# Altium PCB EUS1_Outline_5_trial07.PcbDoc (part 3 of 3)
Units mm, origin at the board's own origin, x right, y up, seen from the top; angles counter-clockwise.
Board outline 95.45 x 90.3 mm, 6 copper layers (Top Layer, Routing 1, GND, EPS_VCC, Routing 2, Bottom Layer), stack 2.257 mm thick; 247 components, 187 nets, 935 pads, 315 vias.
Unrouted connection lines stored in the file: 34.
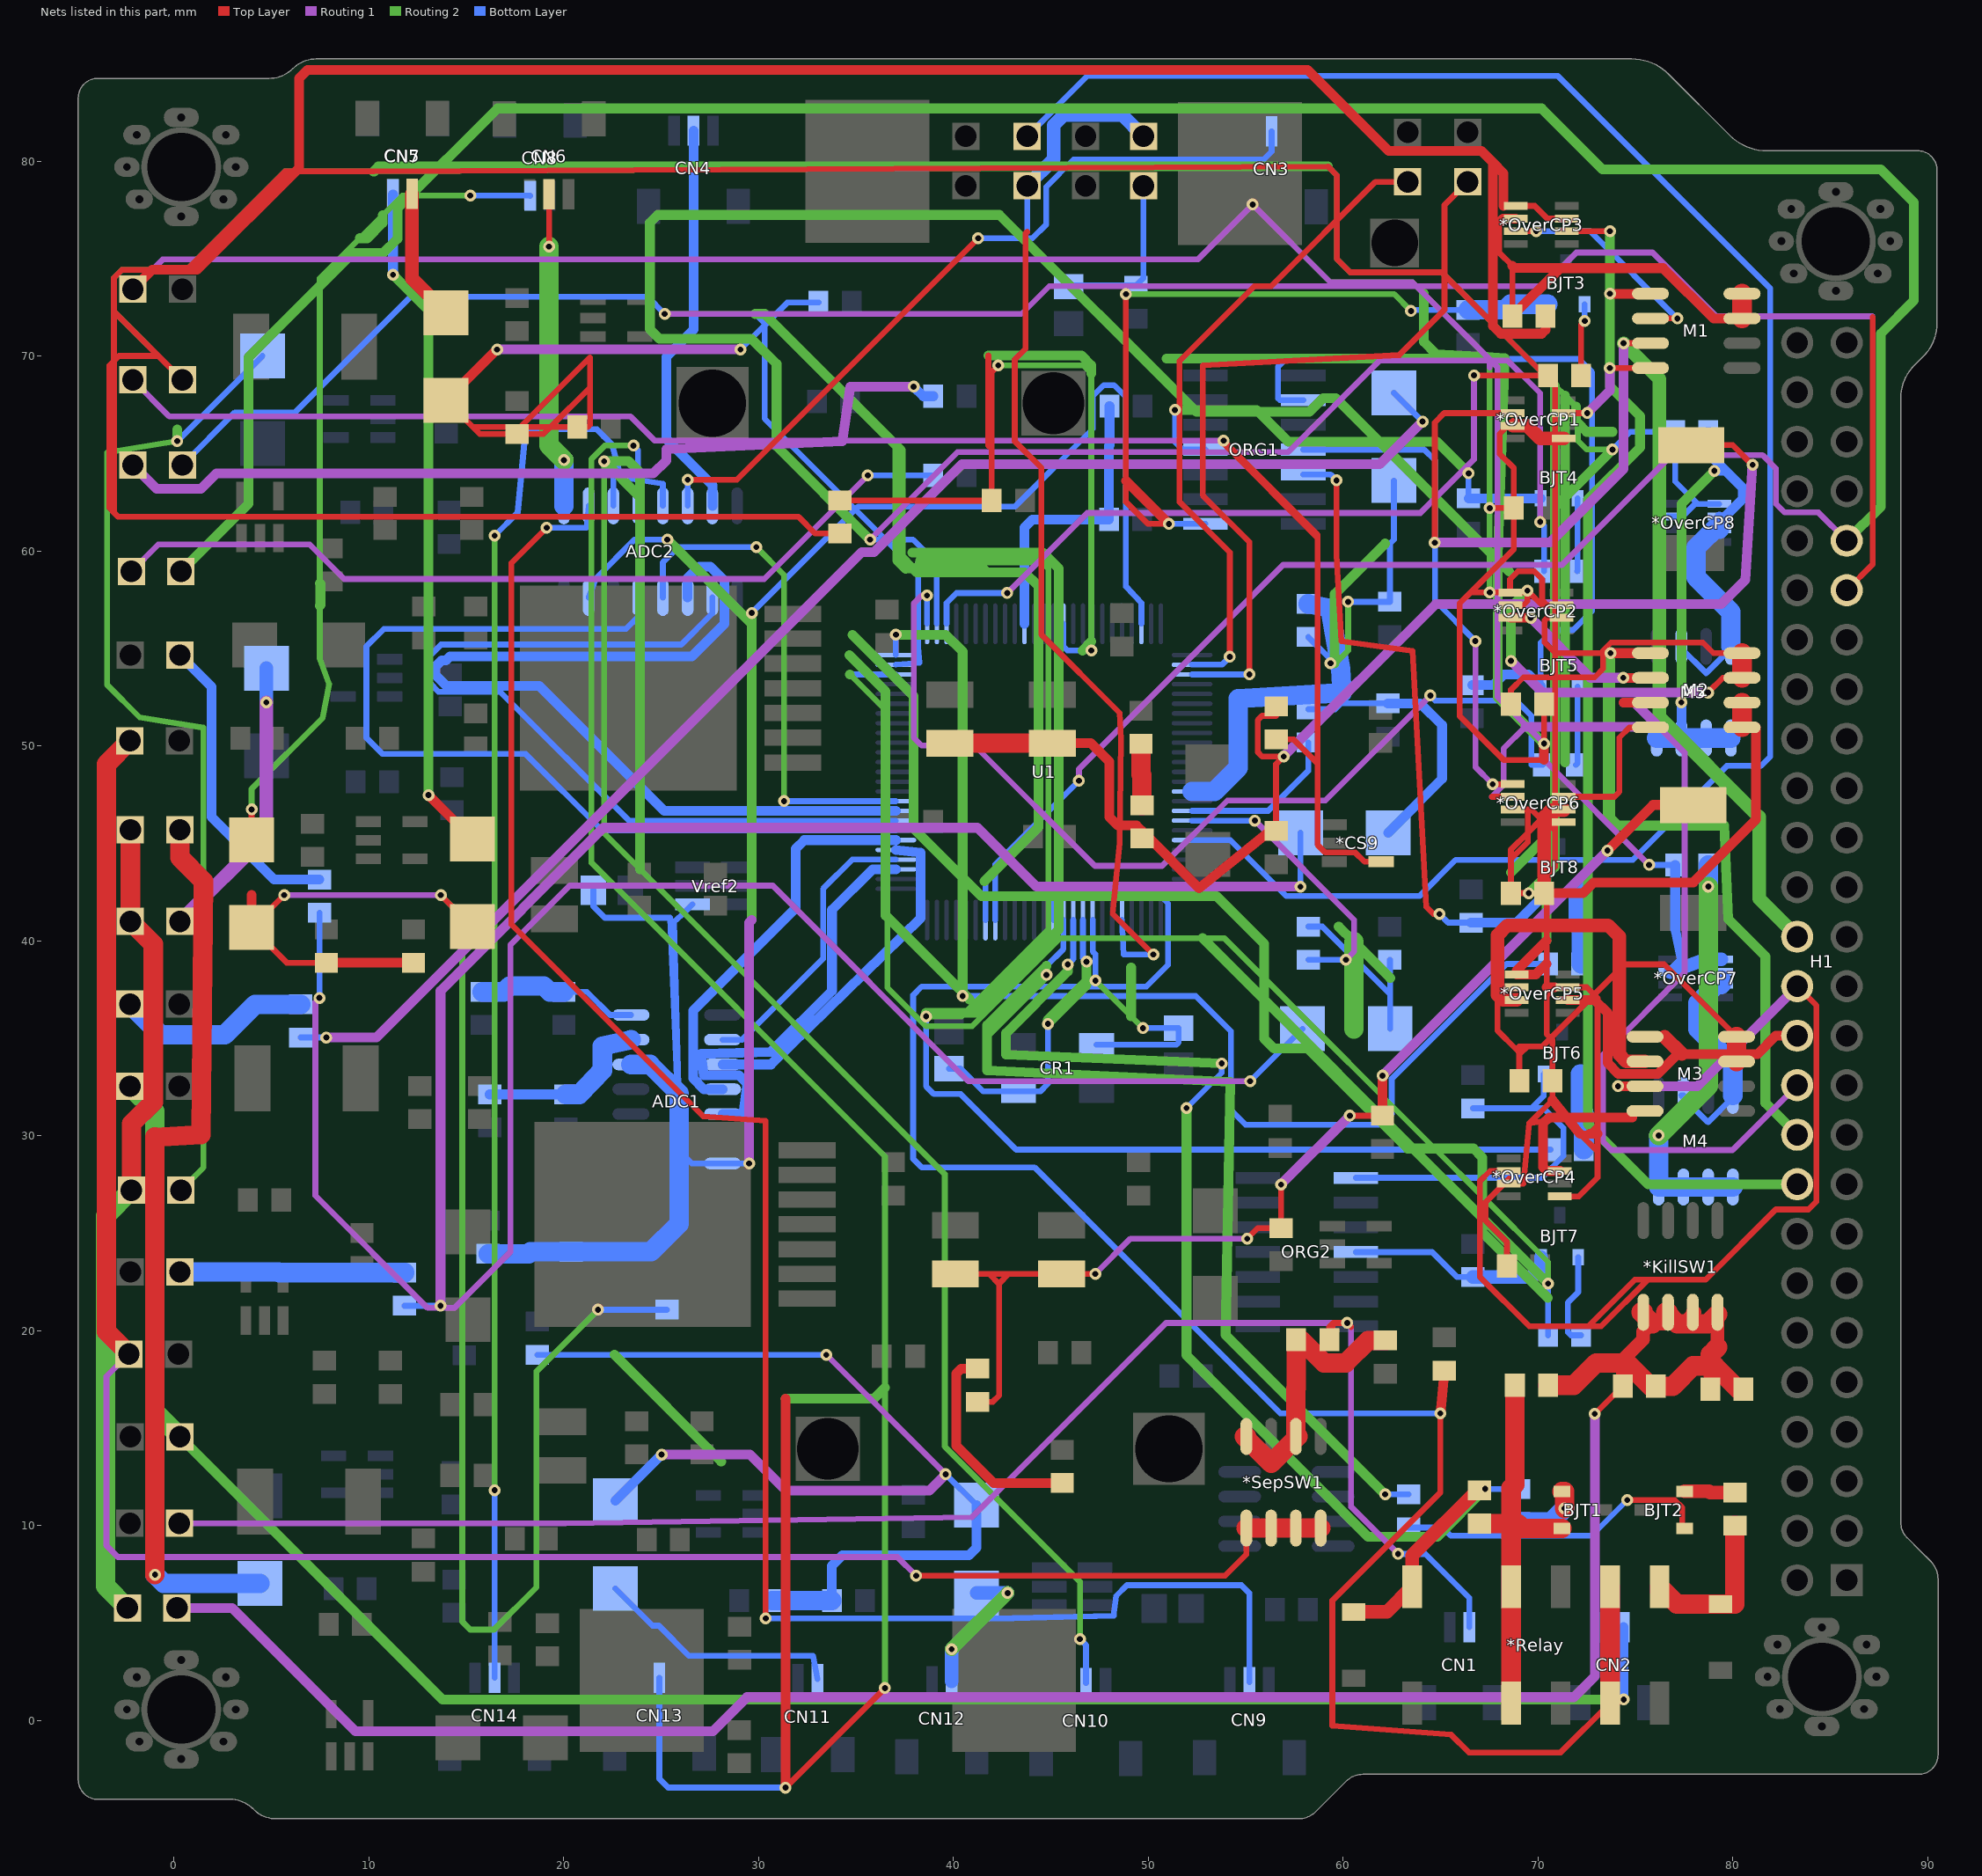
[diagram p7: the nets of this part, all layers, seen from the top]

## Via types
v1: diameter 0.61, hole 0.305, Top Layer to Bottom Layer, 314 vias
v2: diameter 0.61, hole 0.3, Top Layer to Bottom Layer, 1 vias

## Nets (pads, with @x,y where several pads share a name; then routed paths per layer and width w, separated by ;. In a path a pad name is that pad's centre, name@x,y a point inside that pad or via, vN(x,y) a via of type N, cw(c..) or ccw(c..) an arc to the next point about the centre after c; other vN are vias at no path point) (continued)
Net*CS9_4: *CS9.4 R77.1 W14.1 | length 93.4
  Top Layer w0.3: v1@53.873,65.811 v1(53.873,65.659) ; R77.1@56.566,50.33 57.472,50.33 58.692,49.111 ; *CS9.4@61.957,44.059 61.105,44.059 60.633,44.531 59.098,44.531 58.692,44.937 58.692,49.111 ; v1(53.873,65.659) 58.692,60.841 58.692,60.685 ; v1(53.873,65.659) 53.873,65.503 58.692,60.685 ; 58.692,49.111 58.692,60.685
  Routing 1 w0.3: W14.1@-2.108,68.783 -0.228,66.903 23.438,66.903 24.682,65.659 v1(53.873,65.659)
Net*KillSW1_1: *KillSW1.1 *KillSW1.3 R4.1 W1.2 | length 99.5
  Top Layer w0.3: v1(72.924,15.731) 74.338,17.145 R4.1@74.359,17.145
  Top Layer w0.7: R4.1@74.359,17.145 74.359,18.496 75.413,19.55 75.413,19.944 75.819,20.35 75.895,20.35 77.462,20.35 78.003,20.891 78.054,20.942 *KillSW1.3@77.953,20.942
  Top Layer w1: 75.895,20.35 *KillSW1.1@75.413,20.832 ; *KillSW1.1@75.413,20.832 *KillSW1.1@75.413,20.942 75.303,20.942 75.358,20.887 *KillSW1.1@75.413,20.832
  Routing 1 w0.5: W1.2@0.152,5.766 2.994,5.766 9.314,-0.554 27.669,-0.554 29.412,1.189 71.84,1.189 72.924,2.273 v1(72.924,15.731)
Net*KillSW1_2: *KillSW1.2 *KillSW1.4 R6.2 | length 7.3
  Top Layer w0.7: R6.2@78.854,16.993 78.854,18.775 ; 79.223,19.143 79.223,20.84 *KillSW1.4@79.223,20.942
  Top Layer w1: *KillSW1.2@76.683,20.942 76.573,20.942 76.628,20.887 77.165,20.35 78.732,20.35 *KillSW1.4@79.223,20.84 ; 78.854,18.775 79.223,19.143
Net*OverCP1_2: *OverCP1.2 H1.28 M1.3 | length 63.6
  Top Layer w0.3: v1(64.711,60.431) 64.711,66.594 65.194,67.076 *OverCP1.2@68.718,67.076 ; v1(74.399,70.663) M1.3@75.78,70.663
  Routing 1 w0.5: v1(64.711,60.431) 70.63,60.431 74.399,64.201 v1(74.399,70.663)
  Routing 2 w0.7: v1(74.399,70.663) 76.244,68.818 76.244,51.466 81.351,46.36 81.351,42.169 H1.28@83.312,40.208
Net*OverCP1_3: *OverCP1.3 *OverCP1.5 *OverCP2.3 *OverCP2.5 *OverCP3.3 *OverCP3.5 *OverCP7.3 *OverCP7.5 R69.2 R70.2 R71.2 R93.2 W12.2 | length 305
  Top Layer w0.3: v1(67.531,62.205) R69.2@68.771,62.205 ; 68.242,77.708 *OverCP3.5@68.87,77.708 69.842,77.708 70.492,77.058 *OverCP3.3@71.49,77.058 ; *OverCP1.3@68.718,66.426 68.718,66.68 68.591,66.553 68.039,66.001 68.039,64.985 68.771,64.253 R69.2@68.771,62.205 ; 70.32,49.281 68.242,49.281 65.981,51.541 65.981,57.314 66.539,57.871 ; v1(70.32,50.119) R71.2@70.32,52.146 ; *OverCP2.3@71.211,57.221 70.477,57.221 ; 66.539,57.871 68.771,60.103 R69.2@68.771,62.205 ; 66.539,57.871 v1(67.531,57.871) *OverCP2.5@68.572,57.871 ; *OverCP2.5@68.572,57.871 *OverCP2.5@68.591,57.871 69.563,57.871 70.213,57.221 70.477,57.221 ; *OverCP2.5@68.572,57.871 68.572,58.552 68.979,58.958 69.817,58.958 70.223,58.552 70.223,57.475 70.477,57.221
  Top Layer w0.5: W12.2@-2.108,73.431 -1.113,74.427 1.186,74.427 6.418,79.659 6.418,84.256 6.85,84.688 58.184,84.688 62.349,80.523 67.099,80.523 67.683,79.938 ; 68.242,77.708 68.242,79.38 67.683,79.938 ; 70.32,49.281 v1(70.32,50.119) ; R70.2@70.396,72.06 70.396,71.353 70.193,71.15 68.09,71.15 67.683,71.556 67.683,79.938
  Top Layer w0.7: *OverCP1.3@68.718,66.426 69.461,66.426 70.111,65.776 *OverCP1.5@71.338,65.776
  Routing 1 w0.3: W12.2@-2.108,73.431 -0.58,74.96 52.545,74.96 v1(55.364,77.779) 59.352,73.792 63.568,73.792 67.531,69.829 ; 67.531,69.423 67.531,69.829 ; v1(75.71,43.891) 70.32,49.281 v1(70.32,50.119) 67.937,52.502 67.937,57.871 67.937,62.205 67.937,69.423 67.531,69.829
  Routing 2 w0.3: v1(55.364,77.779) 59.352,73.792 63.568,73.792 64.153,73.207 67.403,69.957 67.531,69.829 67.531,69.423 v1(67.531,62.205) v1(67.531,57.871)
  Routing 2 w0.5: 64.153,73.207 64.153,70.744 64.788,70.109 67.403,69.957 68.293,69.905 68.022,62.187 67.937,59.771 67.937,52.502 v1(70.32,50.119)
  Bottom Layer w0.3: v1(75.71,43.891) R93.2@77.051,43.891
  Bottom Layer w0.5: *OverCP7.3@76.795,38.4 77.386,38.991 77.051,40.604 R93.2@77.051,43.891
  Bottom Layer w0.7: *OverCP7.3@76.795,38.4 78.605,39.05 *OverCP7.5@79.415,39.05
Net*OverCP1_7: *OverCP1.7 M1.4 | length 6.1
  Top Layer w0.3: *OverCP1.7@71.338,67.076 v1(72.535,67.076) ; v1(73.697,69.393) M1.4@75.78,69.393
  Routing 1 w0.5: v1(72.535,67.076) 73.697,68.238 v1(73.697,69.393)
Net*OverCP2_2: *OverCP2.2 H1.20 M2.1 | length 48.7
  Top Layer w0.3: *OverCP2.2@71.211,56.571 70.477,56.571 70.35,56.444 70.35,55.3 70.888,54.762 v1(73.728,54.762)
  Top Layer w0.5: v1(73.728,54.762) M2.1@75.78,54.762
  Routing 2 w0.5: H1.20@83.312,30.048 81.679,31.682 81.679,39.197 79.766,41.11 79.57,45.912 74.135,45.912 ; 74.135,45.912 73.981,45.912 73.576,46.317 73.576,54.61 v1(73.728,54.762) 73.728,46.318 74.135,45.912
Net*OverCP2_6: *OverCP2.6 M2.7 M2.8 R71.1 | length 33.9
  Top Layer w0.3: *OverCP2.6@68.591,57.221 69.258,57.221 69.461,57.424 v1(69.461,57.967) ; R71.1@68.618,52.146 68.618,52.883 69.258,53.522 72.916,53.522 73.347,53.954 73.347,54.894 73.754,55.3 78.474,55.3 79.012,54.762 M2.8@80.48,54.762 ; v1(78.732,52.735) 79.49,53.492 M2.7@80.48,53.492
  Top Layer w1: M2.7@80.48,53.492 M2.8@80.48,54.762
  Routing 1 w0.5: v1(68.623,54.361) 70.249,52.735 v1(78.732,52.735)
  Routing 2 w0.5: v1(68.623,54.361) 68.623,57.129 v1(69.461,57.967)
Net*OverCP2_7: *OverCP2.7 M2.2 | length 8.5
  Top Layer w0.5: *OverCP2.7@68.591,56.571 v1(69.639,56.571) ; v1(74.389,53.497) 74.393,53.492 M2.2@75.78,53.492
  Routing 1 w0.5: v1(69.639,56.571) 72.713,53.497 v1(74.389,53.497)
Net*OverCP3_2: *OverCP3.2 H1.18 M1.1 | length 63.9
  Top Layer w0.3: *OverCP3.2@71.49,76.408 v1(73.703,76.408)
  Top Layer w0.5: v1(73.703,73.203) M1.1@75.78,73.203
  Routing 2 w0.5: v1(73.703,76.408) v1(73.703,73.203) 73.703,68.462 75.244,66.921 75.244,65.311 72.576,62.643 72.576,30.596 75.663,27.508 H1.18@83.312,27.508
Net*OverCP3_6: *OverCP3.6 M1.7 M1.8 R70.1 | length 29.8
  Top Layer w0.3: R70.1@68.694,72.06 68.694,74.631 68.01,75.316 68.01,76.865 *OverCP3.6@68.87,77.058
  Top Layer w0.5: 68.01,76.865 68.204,77.058 *OverCP3.6@68.87,77.058 ; R70.1@68.694,72.06 71.148,74.513 76.436,74.513 ; 68.694,74.631 68.798,74.528 76.421,74.528 76.436,74.513 ; M1.7@80.48,71.933 79.016,71.933 76.436,74.513
  Top Layer w1: M1.7@80.48,71.933 M1.8@80.48,73.203
Net*OverCP3_7: *OverCP3.7 M1.2 | length 11.5
  Top Layer w0.3: *OverCP3.7@68.87,76.408 v1(69.918,76.408) ; M1.2@75.78,71.933 v1(77.157,71.933)
  Bottom Layer w0.3: v1(69.918,76.408) 72.682,76.408 v1(77.157,71.933)
Net*OverCP4_2: *OverCP4.2 H1.26 M3.3 | length 55.8
  Top Layer w0.3: *OverCP4.2@68.515,28.189 67.546,28.189 67.023,27.665 67.023,22.763 69.563,20.223 72.585,20.223 ; H1.26@83.312,37.668 84.295,36.685 84.295,26.624 83.888,26.217 82.212,26.217 78.605,22.611 75.639,22.611 ; 72.585,20.223 74.973,22.611 75.639,22.611 ; 72.585,20.223 73.251,20.223 75.639,22.611
  Top Layer w0.5: v1(74.119,32.537) M3.3@75.501,32.537
  Routing 1 w0.5: v1(74.119,32.537) 78.181,32.537 H1.26@83.312,37.668
Net*OverCP4_3: *OverCP4.3 *OverCP4.5 *OverCP5.3 *OverCP5.5 *OverCP6.3 *OverCP6.5 *OverCP8.3 *OverCP8.5 R80.2 R87.2 R88.2 R89.2 R94.2 W14.2 | length 450.9
  Top Layer w0.3: W14.2@0.432,68.783 -0.792,70.007 ; R80.2@34.188,60.896 32.919,60.896 32.063,61.752 -2.853,61.752 -3.081,61.981 ; R87.2@68.415,23.317 68.415,24.546 67.328,25.633 67.328,26.605 68.388,27.666 68.515,27.792 *OverCP4.3@68.515,27.539 69.258,27.539 69.563,30.637 ; *OverCP6.3@68.718,46.741 69.487,46.741 ; v1(69.537,42.443) R89.2@68.618,42.443 68.618,44.196 ; *OverCP4.5@71.135,26.889 72.103,26.889 73.068,27.854 73.068,29.189 ; *OverCP6.5@71.338,46.091 *OverCP6.5@70.884,46.091 ; -3.081,61.981 -3.31,62.209 -3.31,69.524 -3.081,69.753 ; -3.081,61.981 -3.081,69.753 ; -3.081,69.753 -3.081,72.296 ; -3.081,69.753 -2.827,70.007 -0.792,70.007 ; -3.081,72.296 -0.792,70.007 ; -3.081,72.296 -3.081,74.02 -2.675,74.427 0.653,74.427 5.703,79.477 10.242,79.477 59.225,79.735 59.682,79.278 59.682,74.985 60.368,74.3 65.067,74.3 70.884,68.483 *OverCP6.5@70.884,46.091 ; 68.618,44.196 69.487,45.064 69.487,45.547 ; 68.618,44.196 68.618,44.678 69.487,45.547 ; 69.487,45.547 70.173,46.233 ; 69.487,45.547 69.487,46.741 ; 69.487,46.741 69.664,46.741 70.173,46.233 ; 69.563,30.637 71.341,30.916 72.154,30.104 ; 69.563,30.637 70.752,31.826 R88.2@70.752,32.817 70.752,34.909 70.452,35.209 70.452,37.18 ; 70.173,46.233 70.356,46.091 ; 70.173,46.233 70.314,46.091 70.356,46.091 ; 70.356,46.091 70.884,45.685 ; 70.356,46.091 70.477,46.091 ; 70.452,37.18 70.884,37.612 *OverCP5.3@71.541,37.612 72.509,37.612 73.068,37.053 73.068,30.51 ; 70.452,37.18 70.452,37.612 70.452,38.821 70.452,40.01 70.452,43.358 70.884,43.79 70.884,45.685 ; 70.477,46.091 70.884,45.685 ; 70.477,46.091 *OverCP6.5@70.884,46.091 ; 70.884,45.685 *OverCP6.5@70.884,46.091 ; 72.154,30.104 72.662,30.104 73.068,30.51 ; 72.154,30.104 73.068,29.189 ; 73.068,29.189 73.068,30.104 73.068,30.51
  Top Layer w0.5: 70.452,37.612 70.884,37.612 ; 70.452,38.821 69.893,38.262 *OverCP5.5@68.921,38.262 68.921,38.479 70.452,40.01 ; 70.752,31.826 72.154,30.104 ; 72.662,30.104 73.068,30.104
  Routing 2 w0.3: W14.2@0.432,68.783 -3.081,72.296 -3.081,74.02 -2.675,74.427 0.653,74.427 5.703,79.477 10.242,79.477 10.293,79.477 59.225,79.735 59.682,79.278 59.682,74.985 60.368,74.3 65.067,74.3 70.884,68.483 71.391,67.976 71.954,67.413 72.051,67.316 72.051,66.574 72.051,65.665 72.509,65.206 v1(73.83,65.206)
  Routing 2 w0.5: 59.225,79.735 10.5,79.735 ; 68.618,43.51 70.884,45.775 ; v1(69.537,42.443) 70.452,43.358 ; 70.452,40.01 70.452,43.358 ; 70.884,68.483 70.884,62.26 ; 71.391,49.153 71.391,62.767 ; 71.391,67.976 71.391,62.767 ; 71.954,67.413 71.954,66.671 72.051,66.574 72.509,66.116 73.83,66.116 ; v1(73.83,65.206) 71.391,62.767 ; 10.5,79.735 10.242,79.477 10.293,79.477 10.5,79.684 10.5,79.735 ; 70.452,43.358 70.884,43.79 70.884,45.775 ; 70.884,45.775 70.884,62.26 ; 70.884,62.26 71.391,62.767
  Bottom Layer w0.3: v1(73.83,65.206) 74.74,66.116 R94.2@77.051,66.116 77.051,63.565 78.199,62.418 ; *OverCP8.3@76.693,61.768 77.427,61.768 78.077,62.418 78.199,62.418 ; *OverCP8.5@79.313,62.418 78.199,62.418
Net*OverCP4_7: *OverCP4.7 M3.4 | length 8.9
  Top Layer w0.5: *OverCP4.7@71.135,28.189 70.477,28.189 70.274,28.392 70.274,30.637 70.579,30.942 74.846,30.942 74.846,31.267 M3.4@75.501,31.267
Net*OverCP5_2: *OverCP5.2 H1.24 M3.1 | length 17.9
  Top Layer w0.5: *OverCP5.2@71.541,36.962 72.916,36.962 73.576,36.302 73.576,33.736 74.135,33.177 76.167,33.177 77.183,34.193 77.386,34.193 81.272,34.193 82.207,35.128 H1.24@83.312,35.128 ; M3.1@75.501,35.077 76.502,35.077
  Top Layer w0.7: 76.502,35.077 77.386,34.193
Net*OverCP5_6: *OverCP5.6 M3.7 M3.8 R88.1 | length 22.6
  Top Layer w0.3: *OverCP5.6@68.921,37.612 68.921,37.562 68.242,37.562 67.937,37.257 67.937,35.387 68.9,34.424 ; R88.1@69.05,32.817 69.05,34.168 ; M3.8@80.201,35.077 76.488,38.79 74.44,38.79 70.223,34.574 69.456,34.574 ; 68.9,34.424 69.05,34.574 69.456,34.574 ; 68.9,34.424 69.05,34.274 ; 69.05,34.168 69.103,34.221 ; 69.05,34.168 69.05,34.274 ; 69.05,34.274 69.103,34.221 ; 69.103,34.221 69.456,34.574
  Top Layer w1: M3.7@80.201,33.807 M3.8@80.201,35.077
Net*OverCP5_7: *OverCP5.7 M3.2 | length 18.4
  Top Layer w0.7: *OverCP5.7@68.921,36.962 68.191,36.962 67.937,37.216 67.937,40.289 68.445,40.797 73.601,40.797 74.186,40.213 74.186,34.163 74.541,33.807 M3.2@75.501,33.807
Net*OverCP6_1: *OverCP6.1 ORG1.11 | length 25.9
  Top Layer w0.3: v1(67.683,48.036) 67.688,48.041 *OverCP6.1@68.718,48.041
  Routing 1 w0.3: v1(66.794,55.377) 66.794,48.925 v1(67.683,48.036)
  Bottom Layer w0.3: ORG1.11@57.963,65.202 64.166,65.202 64.721,64.648 64.721,57.45 v1(66.794,55.377)
Net*OverCP6_2: *OverCP6.2 H1.22 M2.3 | length 51
  Top Layer w0.3: 67.649,47.391 *OverCP6.2@68.718,47.391
  Top Layer w0.5: 74.393,52.222 M2.3@75.78,52.222
  Routing 1 w0.3: 67.649,47.392 68.242,47.985 68.242,49.865 69.36,50.982 ; 76.209,50.982 77.538,49.653 77.538,38.359 73.347,34.168 73.347,29.697 73.779,29.265 79.989,29.265 H1.22@83.312,32.588
  Routing 1 w0.5: 69.36,50.982 76.209,50.982 74.969,52.222 74.393,52.222
Net*OverCP6_6: *OverCP6.6 M2.5 M2.6 R89.1 | length 24.3
  Top Layer w0.5: R89.1@70.32,42.443 72.327,42.443 72.869,42.986 77.975,42.986 81.196,46.207 81.196,50.952 M2.5@80.48,50.952
  Top Layer w0.7: R89.1@70.32,42.443 70.32,46.36 70.651,46.691 71.338,46.691 *OverCP6.6@71.338,46.741
  Top Layer w1: M2.5@80.48,50.952 M2.6@80.48,52.222
Net*OverCP6_7: *OverCP6.7 M2.4 | length 7.5
  Top Layer w0.3: *OverCP6.7@71.338,47.391 73.932,47.391 74.186,47.645 74.186,50.424 74.714,50.952 M2.4@75.78,50.952
Net*OverCP7_6: *OverCP7.6 M4.5 M4.6 M4.7 M4.8 R93.1 | length 21.4
  Routing 2 w1: v1(76.2,30.01) 78.753,32.563 v1(78.753,42.783)
  Bottom Layer w1: v1(76.2,30.01) M4.8@76.2,27.368 M4.7@77.47,27.368 M4.6@78.74,27.368 M4.5@80.01,27.368 ; v1(78.753,42.783) R93.1@78.753,43.891
Net*OverCP7_7: *OverCP7.7 M4.2 M4.4 | length 11.4
  Bottom Layer w0.3: M4.2@77.47,32.068 77.361,32.068 77.415,32.013 78.737,30.692 80.01,31.966 M4.4@80.01,32.068
  Bottom Layer w1: *OverCP7.7@79.415,37.75 79.415,38 78.224,36.809 78.224,35.471 80.01,33.685 M4.4@80.01,32.068
Net*OverCP8_6: *OverCP8.6 M5.5 M5.6 M5.7 M5.8 R94.1 | length 25
  Routing 2 w0.5: v1(77.368,52.227) 77.368,62.42 v1(79.062,64.114)
  Bottom Layer w0.5: M5.7@77.368,50.406 v1(77.368,52.227) ; R94.1@78.753,66.116 78.753,65.003 79.642,64.114 ; v1(79.062,64.114) 79.642,64.114 ; *OverCP8.6@79.313,61.768 79.313,61.47 79.462,61.619 80.51,62.666 80.51,63.246 79.642,64.114
  Bottom Layer w1: M5.8@76.098,50.406 M5.7@77.368,50.406 M5.6@78.638,50.406 M5.5@79.908,50.406
Net*OverCP8_7: *OverCP8.7 M5.2 M5.4 | length 11.7
  Bottom Layer w0.3: M5.2@77.368,55.106 77.259,55.106 77.314,55.051 78.635,53.73 79.908,55.003 M5.4@79.908,55.106
  Bottom Layer w1: *OverCP8.7@79.313,61.118 79.313,61.368 78.123,60.177 78.123,58.661 79.908,56.875 M5.4@79.908,55.106
Net*Relay_2: *Relay.2 D1.1 R2.2 | length 10
  Top Layer w0.7: D1.1@60.554,5.563 62.255,5.563 *Relay.2@63.551,6.858 63.551,8.463 66.886,11.798 R2.2@67.005,11.798
Net*Relay_3: *Relay.3 *Relay.10 R3.2 | length 16.4
  Top Layer w1: *Relay.3@68.631,0.889 *Relay.10@68.631,6.858 68.631,11.917 68.821,12.108 R3.2@68.821,17.196
Net*Relay_5: *Relay.5 *Relay.8 R5.2 U1.37 | length 107.2
  Top Layer w0.3: v1(64.999,15.753) 64.999,11.696 59.454,6.151 59.454,-0.275 65.55,-0.732 66.464,-1.646 71.175,-1.646 *Relay.5@73.711,0.889
  Top Layer w0.5: v1(64.999,15.753) R5.2@65.202,17.945
  Top Layer w1: *Relay.5@73.711,0.889 *Relay.8@73.711,6.858
  Bottom Layer w0.3: U1.37@45.153,41.066 45.153,42.245 50.564,42.372 51.021,41.915 51.021,38.765 49.903,37.647 38.372,37.647 37.94,37.216 37.94,28.808 38.372,28.376 44.163,28.376 56.787,15.753 v1(64.999,15.753)
Net*Relay_7: *Relay.7 D2.1 R7.1 | length 8.4
  Top Layer w1: *Relay.7@76.251,6.858 76.251,6.608 76.501,6.608 77.14,5.969 D2.1@79.375,5.969 80.112,5.969 R7.1@80.112,9.995
Net*SepSW1_2: *SepSW1.2 *SepSW1.4 R11.2 R13.2 | length 16.6
  Top Layer w1: *SepSW1.4@55.042,14.567 *SepSW1.4@54.932,14.567 ; R13.2@62.179,19.494 61.29,19.494 60.139,18.343 59.017,18.343 57.828,19.533 R11.2@57.595,19.533 57.595,17.035 57.582,17.023 *SepSW1.2@57.582,14.567 57.684,14.567 57.633,14.516 56.308,13.192 ; *SepSW1.4@54.932,14.567 *SepSW1.4@54.987,14.513 ; *SepSW1.4@54.932,14.567 *SepSW1.4@54.987,14.513 ; *SepSW1.4@54.987,14.513 56.308,13.192 ; *SepSW1.4@54.987,14.513 56.308,13.192
Net*SepSW1_5: *SepSW1.5 *SepSW1.6 *SepSW1.7 *SepSW1.8 W11.1 W13.1 | length 107.5
  Top Layer w0.3: v1(38.092,7.421) 53.952,7.421 55.042,8.512 *SepSW1.5@55.042,9.867
  Top Layer w1: W13.1@-2.311,18.796 -3.462,19.947 -3.462,49.065 W11.1@-2.261,50.267 ; *SepSW1.5@55.042,9.867 *SepSW1.6@56.312,9.867 *SepSW1.7@57.582,9.867 *SepSW1.8@58.852,9.867
  Routing 1 w0.3: W13.1@-2.311,18.796 -3.462,17.645 -3.462,8.971 -2.874,8.383 37.131,8.383 v1(38.092,7.421)
NetADC1_10: ADC1.10 U1.54 | length 14.8
  Bottom Layer w0.3: ADC1.10@28.156,34.925 29.161,34.925 33.317,39.081 33.317,42.668 34.816,44.166 U1.54@37.053,44.166
NetADC1_11: ADC1.11 U1.55 | length 17.9
  Bottom Layer w0.5: ADC1.11@28.156,33.655 30.653,33.655 38.321,41.152 38.321,44.531 U1.55@37.053,44.666
NetADC1_12: ADC1.12 U1.56 | length 21
  Bottom Layer w0.5: ADC1.12@28.156,32.385 27.196,32.385 26.645,32.936 26.645,36.411 31.92,41.686 31.92,44.734 32.352,45.166 U1.56@37.053,45.166
NetADC1_13: ADC1.13 U1.53 | length 22.5
  Bottom Layer w0.5: ADC1.13@28.156,31.115 29.231,31.115 29.439,32.664 29.007,33.096 27.203,33.096 27.056,34.194 30.625,34.295 33.774,37.444 33.774,41.584 35.857,43.666 U1.53@37.053,43.666
NetADC2_10: ADC2.10 U1.58 | length 44.5
  Bottom Layer w0.3: ADC2.10@27.635,57.619 27.635,56.799 26.038,55.202 13.712,55.202 13.126,54.617 13.126,53.231 13.581,52.776 16.741,52.776 23.35,46.166 U1.58@37.053,46.166
NetADC2_11: ADC2.11 U1.59 | length 48.3
  Bottom Layer w0.5: ADC2.11@26.365,57.619 26.365,58.61 26.96,59.205 27.536,59.205 28.255,58.486 28.255,56.258 26.586,54.589 14.16,54.589 13.962,54.392 13.737,54.392 13.426,54.081 13.426,53.637 13.988,53.076 18.752,53.076 25.162,46.666 U1.59@37.053,46.666
NetADC2_12: ADC2.12 U1.60 | length 26.3
  Routing 2 w0.3: v1(29.886,60.205) 31.316,58.775 v1(31.316,47.166)
  Bottom Layer w0.3: ADC2.12@25.095,57.619 25.095,59.419 25.881,60.205 v1(29.886,60.205) ; v1(31.316,47.166) U1.60@37.053,47.166
NetADC2_13: ADC2.13 U1.57 | length 49.4
  Bottom Layer w0.3: ADC2.13@23.825,57.619 23.825,56.629 23.198,56.002 10.778,56.002 9.881,55.105 9.881,50.416 10.711,49.585 18.052,49.585 21.971,45.666 U1.57@37.053,45.666
NetB1_41: H1.41 U1.44 W22.2 | length 204.7
  Top Layer w0.3: H1.41@85.852,57.988 87.19,59.327 87.19,72.014
  Routing 1 w0.3: v1(25.189,72.166) 43.502,72.166 44.925,73.588 70.249,73.588 71.976,75.316 75.887,75.316 79.164,72.039 87.165,72.039 87.19,72.014
  Routing 2 w0.3: v1(25.189,72.166) 29.837,72.166
  Routing 2 w0.5: 29.837,72.166 30.319,72.166 37.131,65.354 ; 41.597,43.058 44.366,45.826 44.366,58.196 43.655,58.907 41.724,58.907 ; 37.131,65.354 37.131,59.517 37.559,59.089 37.905,59.117 ; 37.131,65.354 37.301,65.184 37.301,59.721 37.905,59.117 ; 37.905,59.117 38.115,58.907 41.724,58.907 ; 37.905,59.117 41.242,59.39 41.724,58.907
  Bottom Layer w0.3: W22.2@0.432,64.414 3.135,67.117 6.221,67.117 12.156,73.053 24.302,73.053 v1(25.189,72.166) ; 29.837,72.166 30.319,71.684 30.319,66.786 38.198,58.907 43.655,58.907 44.366,58.196 44.366,45.826 41.653,43.113 U1.44@41.653,41.066
NetB1_43: H1.43 U1.43 W21.2 | length 183.4
  Routing 1 w0.3: v1(46.449,48.217) 46.449,48.811 56.926,59.288 71.239,59.288 76.878,64.927 81.526,64.927 82.212,64.241 82.212,62.438 82.669,61.981 84.4,61.981 H1.43@85.852,60.528
  Routing 2 w0.5: W21.2@0.356,58.953 3.828,62.425 3.828,69.936 9.178,75.287 10.736,75.287 11.476,76.027 11.476,77.585 16.598,82.707 70.198,82.707 73.322,79.583 87.597,79.583 89.299,77.881 89.299,72.852 87.597,71.15 87.597,62.273 H1.43@85.852,60.528
  Bottom Layer w0.3: U1.43@42.153,41.066 42.153,43.921 v1(46.449,48.217)
NetBJT1_1: BJT1.1 R1.1 | length 3.6
  Top Layer w1: BJT1.1@71.239,11.745 71.366,11.745 v1(71.366,10.876)
  Bottom Layer w1: R1.1@69.012,10.173 70.663,10.173 v1(71.366,10.876)
NetBJT1_2: BJT1.2 R2.1 | length 4.3
  Top Layer w1: R2.1@67.005,10.096 68.979,10.096 69.23,9.845 BJT1.2@71.239,9.845
NetBJT2_1: BJT2.1 R8.1 | length 16.3
  Top Layer w0.3: v1(74.592,11.308) 77.03,11.308 77.411,10.927 77.411,9.845 BJT2.1@77.529,9.845
  Bottom Layer w0.3: R8.1@63.373,9.893 65.118,9.893 65.532,9.479 72.763,9.479 v1(74.592,11.308)
NetBJT2_2: BJT2.2 R7.2 | length 2.6
  Top Layer w0.7: BJT2.2@77.529,11.745 78.783,11.745 78.831,11.697 R7.2@80.112,11.697
NetBJT3_1: BJT3.1 R56.1 | length 3.7
  Top Layer w0.3: R56.1@72.225,69.012 72.225,71.628 v1(72.408,71.81)
  Bottom Layer w0.3: BJT3.1@72.4,72.661 72.4,71.818 v1(72.408,71.81)
NetBJT4_1: BJT4.1 R57.1 | length 3.8
  Bottom Layer w0.3: R57.1@72.022,58.953 72.045,58.976 BJT4.1@72.045,62.704
NetBJT5_1: BJT5.1 R58.1 | length 4.1
  Bottom Layer w0.3: R58.1@71.946,49.022 72.045,49.121 BJT5.1@72.045,53.052
NetBJT6_1: BJT6.1 R81.1 | length 3.9
  Bottom Layer w1: BJT6.1@72.197,33.164 72.197,31.3 72.352,31.145 R81.1@72.352,29.286
NetBJT7_1: BJT7.1 R82.1 | length 4.8
  Bottom Layer w0.3: BJT7.1@72.07,23.766 72.07,21.97 71.548,21.448 71.548,19.91 71.696,19.761 R82.1@72.225,19.761
NetBJT8_1: BJT8.1 R83.1 | length 3.9
  Bottom Layer w1: BJT8.1@72.07,42.689 72.07,40.825 72.225,40.67 R83.1@72.225,38.811
NetBJT8_2: BJT8.2 ORG1.12 R86.2 | length 34.2
  Top Layer w0.3: v1(59.662,63.626) 59.662,59.779 59.911,55.377 63.568,54.869 64.28,41.737 64.64,41.376 v1(64.953,41.376)
  Bottom Layer w0.3: ORG1.12@57.963,63.932 59.357,63.932 v1(59.662,63.626) ; v1(64.953,41.376) 65.397,40.932 R86.2@66.573,40.932
  Bottom Layer w0.5: R86.2@66.573,40.932 68.908,40.932 70.17,42.194 BJT8.2@70.17,42.689
NetC5_2: C5.2 D4.1 R20.1 | length 14.1
  Bottom Layer w0.3: R20.1@58.217,51.879 59.601,51.879 59.906,52.184 C5.2@62.306,52.184
  Bottom Layer w0.5: C5.2@62.306,52.184 63.975,52.184 65.085,51.074 65.085,48.307 D4.1@62.321,45.542
NetC11_2: C11.2 D9.1 R34.1 | length 17.4
  Routing 2 w0.5: 59.779,40.729 60.554,39.954 62.423,38.085
  Routing 2 w1: 60.554,35.484 60.554,39.954
  Bottom Layer w0.3: R34.1@58.217,40.729 58.941,40.729 62.423,37.247 ; C11.2@62.408,39.027 62.408,38.085 62.423,38.07 62.423,37.247 ; D9.1@62.423,35.484 62.423,37.247
NetC17_2: C17.2 D14.1 R48.1 | length 21.4
  Routing 2 w0.3: v1(59.36,54.242) 59.462,54.242 59.517,54.296 59.563,54.296 59.665,54.296 60.262,54.894 v1(60.262,57.391)
  Routing 2 w0.5: v1@59.563,54.242 59.563,54.296 59.563,57.785 62.158,60.38
  Bottom Layer w0.3: R48.1@58.217,55.588 59.563,54.242 v1(59.36,54.242) ; v1(60.262,57.391) C17.2@62.408,57.391 62.408,60.38 62.611,60.584 D14.1@62.611,63.612
NetC24_1: C24.1 C25.1 L4.2 R65.1 R66.2 R67.2 | length 58.8
  Top Layer w0.3: C24.1@40.107,22.911 41.831,22.911 ; R65.1@41.25,16.345 42.029,16.345 42.359,16.675 42.359,22.382 ; v1(47.287,22.911) C25.1@45.568,22.911 42.842,22.911 ; v1(55.085,24.719) 55.626,25.26 R66.2@56.82,25.26 v1(56.82,27.492) ; v1(60.353,31.026) R67.2@62.027,31.026 ; 41.831,22.911 42.359,22.382 ; 41.831,22.911 42.842,22.911 ; 42.359,22.382 42.359,22.428 42.842,22.911
  Top Layer w0.5: R67.2@62.027,31.026 v1(62.027,33.083) ; v1(73.576,44.632) 75.915,46.971 L4.2@77.978,46.971
  Routing 1 w0.3: v1(47.287,22.911) 49.095,24.719 v1(55.085,24.719)
  Routing 1 w0.5: v1(56.82,27.492) v1(60.353,31.026) ; v1(62.027,33.083) v1(73.576,44.632)
NetC31_1: C31.1 C32.1 L5.2 R75.1 R76.2 R77.2 | length 70.1
  Top Layer w0.3: R76.2@56.566,45.631 56.566,49.068 v1(56.957,49.458) 55.847,49.458 55.619,49.686 55.619,51.313 55.847,51.541 56.566,51.541 R77.2@56.566,52.032 ; L5.2@77.876,65.437 80,65.437 v1(81.018,64.419)
  Top Layer w0.5: C32.1@45.085,50.14 47.063,50.14 47.998,49.204 47.998,46.36 48.43,45.928 49.243,45.928 ; R76.2@56.566,45.631 56.253,45.631 52.621,42.702 R75.1@49.878,45.445 ; 49.243,45.928 49.395,45.775 49.395,45.25 R75.1@49.682,45.25 R75.1@49.682,45.641 ; 49.243,45.928 49.395,45.928 ; 49.395,45.928 R75.1@49.682,45.641 ; 49.395,45.928 R75.1@49.682,45.641 ; R75.1@49.682,45.641 R75.1@49.878,45.445 ; R75.1@49.682,45.641 R75.1@49.878,45.445
  Top Layer w1: C31.1@39.827,50.14 C32.1@45.085,50.14
  Routing 1 w0.5: v1(56.957,49.458) 64.769,57.271 79.407,57.271 80.653,58.516 v1(81.018,64.419)
NetC36_2: C36.2 R90.2 W15.2 | length 8.8
  Bottom Layer w0.3: C36.2@45.923,73.569 45.977,73.622 R90.2@49.378,73.622 49.759,74.003 W15.2@49.759,78.74
NetC37_2: C37.2 CR1.3 U1.34 | length 17.8
  Routing 2 w0.5: v1(44.856,35.738) 46.838,37.719 46.838,37.922 ; v1@44.856,35.941 46.838,37.922 ; v1(46.838,38.925) 46.838,37.922
  Bottom Layer w0.3: C37.2@39.776,33.442 40.371,33.442 41.541,32.271 CR1.3@43.346,32.271 44.463,32.271 44.856,32.664 v1(44.856,35.738) ; U1.34@46.653,41.066 46.653,39.109 v1(46.838,38.925)
NetC38_2: C38.2 CR1.1 U1.33 | length 16
  Routing 2 w0.3: v1(47.295,37.958) 49.124,36.129 v1(49.733,35.519)
  Routing 2 w0.5: 49.124,36.129 49.124,38.633
  Bottom Layer w0.3: U1.33@47.153,41.066 47.153,39.451 47.295,39.309 v1(47.295,37.958) ; CR1.1@47.346,34.671 51.456,34.671 51.562,34.777 C38.2@51.562,35.519 v1(49.733,35.519)
NetCN1_1: CN1.1 R11.1 W2.2 | length 85.6
  Top Layer w0.3: v1@60.419,20.188 v1(60.216,20.391) 59.504,20.391 ; 59.504,20.391 59.296,20.183 R11.1@59.296,19.533 59.504,20.391
  Routing 1 w0.3: W2.2@0.279,10.109 20.079,10.109 40.946,10.419 50.919,20.391 v1(60.216,20.391) ; v1@60.419,20.188 60.419,10.952 v1(62.832,8.539)
  Bottom Layer w0.3: v1(62.832,8.539) 64.229,8.539 66.478,6.289 CN1.1@66.478,4.782
NetCN2_1: CN2.1 W3.1 W4.2 | length 102.4
  Routing 2 w0.5: W4.2@0.305,14.554 13.788,1.071 v1(74.403,1.071)
  Routing 2 w1: W3.1@-2.261,32.537 -0.973,31.25 -0.973,15.832 W4.2@0.305,14.554
  Bottom Layer w0.5: v1(74.403,1.071) CN2.1@74.403,4.782
NetCN5_1: CN5.1 D3.1 | length 6.8
  Top Layer w0.7: CN5.1@12.224,78.327 12.224,73.973 D3.1@13.97,72.227
NetCN7_1: CN7.1 D7.1 | length 34.8
  Top Layer w0.5: v1(13.066,47.477) D7.1@15.316,45.227
  Routing 2 w0.5: v1(11.246,74.171) 13.066,72.351 v1(13.066,47.477)
  Bottom Layer w0.5: v1(11.246,74.171) CN7.1@11.246,78.302
NetCN8_1: CN8.1 D8.1 | length 46.1
  Top Layer w0.3: D8.1@3.988,45.176 v1(3.988,46.741)
  Routing 2 w0.3: v1(3.988,46.741) 3.988,47.79 7.638,51.44 7.962,53.186 7.485,54.48 7.485,57.2 7.485,58.344 7.485,73.995 9.538,76.048 10.715,77.225 11.727,78.237 v1(15.207,78.237)
  Routing 2 w0.5: 7.485,57.2 7.52,57.235 7.52,58.31 7.485,58.344 ; 9.538,76.048 9.924,76.048 10.715,76.84 10.715,77.225
  Bottom Layer w0.3: v1(15.207,78.237) 18.281,78.237 CN8.1@18.281,78.225
NetCN11_1: CN11.1 D12.1 | length 12.8
  Bottom Layer w0.3: D12.1@22.657,6.767 24.565,4.858 24.89,4.858 26.44,3.308 32.796,3.308 CN11.1@33.027,2.115
NetCN12_1: CN12.1 D13.1 | length 7.3
  Routing 2 w0.7: v1(39.91,3.651) v1(42.791,6.532)
  Bottom Layer w0.7: CN12.1@39.91,2.013 v1(39.91,3.651) ; D13.1@41.199,6.538 42.785,6.538 v1(42.791,6.532)
NetD4_2: D4.2 R95.1 | length 69.6
  Routing 1 w0.5: v1(13.683,21.272) 13.683,37.444 22.039,45.8 41.242,45.8 44.264,42.778 v1(57.821,42.778)
  Bottom Layer w0.3: R95.1@11.836,21.272 v1(13.683,21.272) ; v1(57.821,42.778) D4.2@57.821,45.542
NetD6_2: D6.2 W6.1 | length 52.3
  Routing 2 w0.3: v1(0.168,65.638) -3.437,65.054 -3.437,53.141 -1.762,51.467 1.516,50.933 1.516,28.364 W6.1@0.356,27.203
  Routing 2 w0.5: v1(0.168,65.638) 0.168,66.248
  Bottom Layer w0.3: v1(0.168,65.638) D6.2@4.547,70.017
NetD9_2: D9.2 R96.1 | length 91.1
  Routing 1 w0.3: v1(7.468,37.071) 7.257,36.86 7.257,26.929 13.022,21.163 14.394,21.163 17.264,24.033 17.264,39.781 20.312,42.829 30.735,42.829 40.768,32.796 v1(55.235,32.796)
  Bottom Layer w0.3: v1(7.468,37.071) R96.1@7.468,41.44 ; v1(55.235,32.796) D9.2@57.923,35.484
NetD11_2: D11.2 W8.1 | length 14.8
  Routing 1 w0.7: W8.1@0.305,40.996 4.742,45.433 v1(4.742,52.227)
  Bottom Layer w0.7: v1(4.742,52.227) 4.75,52.235 D11.2@4.75,53.99
NetD14_2: D14.2 R97.1 | length 72.7
  Routing 1 w0.5: v1(7.823,35.039) 10.389,35.039 35.296,59.946 35.933,59.946 40.441,64.454 61.894,64.454 v1(64.081,66.642)
  Bottom Layer w0.3: R97.1@6.502,35.039 v1(7.823,35.039) ; D14.2@62.611,68.112 v1(64.081,66.642)
NetD16_2: D16.2 W10.1 | length 46.5
  Top Layer w1: v1(-0.973,7.472) -0.973,29.926 1.389,30.053 1.516,43.058 0.305,44.269 W10.1@0.305,45.695
  Bottom Layer w1: v1(-0.973,7.472) -0.522,7.021 D16.2@4.42,7.021
NetR1_2: R1.2 U1.35 | length 57
  Routing 2 w0.5: v1(45.872,38.786) 45.872,38.43 42.697,35.255 42.697,34.168 v1(53.772,33.706) ; v1(51.968,31.42) 51.968,18.745 61.29,9.423 64.846,9.423 v1(67.297,11.874)
  Bottom Layer w0.3: v1(45.872,38.786) 46.153,39.067 U1.35@46.153,41.066 ; v1(51.968,31.42) 53.772,33.223 v1(53.772,33.706) ; v1(67.297,11.874) R1.2@69.012,11.874
NetR3_1: R3.1 R4.2 R6.1 | length 11.9
  Top Layer w1: R3.1@70.523,17.196 71.844,17.196 72.992,18.343 74.587,18.343 75.786,17.145 R4.2@76.06,17.145 76.924,17.145 77.97,18.191 79.083,18.191 80.282,16.993 R6.1@80.556,16.993
NetR8_2: R8.2 U1.36 | length 52.4
  Routing 2 w0.5: v1(44.78,38.252) 41.732,35.204 ; 44.78,38.71 41.732,35.662 41.732,35.204 ; v1(62.167,11.595) 53.977,19.784 54.221,32.766 41.732,33.355 41.732,35.204
  Bottom Layer w0.3: v1(44.78,38.252) 44.78,38.71 45.653,39.583 U1.36@45.653,41.066 ; v1(62.167,11.595) R8.2@63.373,11.595
NetR9_2: R9.2 R10.1 U1.86 | length 15.3
  Bottom Layer w0.5: U1.86@43.653,56.266 43.653,61.212 44.061,61.62 R10.1@47.993,61.62 47.993,65.41 48.019,65.435 R9.2@48.019,67.437
NetR20_2: R20.2 U1.17 | length 8.3
  Bottom Layer w0.3: U1.17@52.253,46.666 56.161,46.666 58.217,48.722 R20.2@58.217,50.178
NetR34_2: R34.2 U1.18 | length 14.6
  Routing 1 w0.3: v1(55.476,46.166) 60.571,41.071 60.571,39.451 v1(60.147,39.027)
  Bottom Layer w0.3: U1.18@52.253,46.166 v1(55.476,46.166) ; R34.2@58.217,39.027 v1(60.147,39.027)
NetR48_2: R48.2 U1.15 | length 17.3
  Bottom Layer w1: U1.15@52.253,47.666 53.408,47.666 54.619,48.877 54.619,52.428 59.953,52.728 59.885,53.929 59.327,57.061 R48.2@58.217,57.29
NetR56_2: R56.2 U1.78 | length 39.3
  Top Layer w0.3: v1(66.725,69.012) R56.2@70.523,69.012
  Routing 1 w0.3: v1(42.766,57.845) 46.872,61.951 63.974,61.951 66.725,64.701 v1(66.725,69.012)
  Bottom Layer w0.3: U1.78@39.653,56.266 39.653,57.332 40.166,57.845 v1(42.766,57.845)
NetR57_2: R57.2 U1.77 | length 131.3
  Routing 1 w0.3: v1(35.73,60.584) 40.221,65.075 57.188,65.075 61.892,69.778 68.445,69.778 70.122,68.102 v1(70.122,61.498)
  Routing 2 w0.5: v1(35.73,60.584) 30.929,65.384 30.929,69.601 29.634,70.896 24.909,70.896 24.427,71.379 24.427,76.84 24.833,77.246 42.359,77.246 52.469,67.137 58.285,67.137 58.988,67.839 59.635,67.839 68.521,58.953
  Bottom Layer w0.3: v1(35.73,60.584) 37.934,60.584 39.153,59.364 U1.77@39.153,56.266 ; v1(70.122,61.498) 70.32,61.3 R57.2@70.32,58.953
NetR58_2: R58.2 U1.76 | length 50.8
  Routing 1 w0.3: v1(38.653,57.713) 38.372,57.713 37.965,57.307 37.965,50.424 38.372,50.017 41.091,50.017 47.266,43.843 50.714,43.843 54.069,47.198 59.098,47.198 v1(64.483,52.583)
  Bottom Layer w0.3: U1.76@38.653,56.266 v1(38.653,57.713) ; v1(64.483,52.583) 64.735,52.33 68.875,52.33 69.664,51.541 69.664,49.022 R58.2@70.244,49.022
NetR64_1: R64.1 R65.2 | length 11.1
  Top Layer w0.5: R65.2@41.25,18.047 40.404,18.047 40.15,17.793 40.15,14.102 42.072,12.179 R64.1@45.593,12.179
NetR74_1: R74.1 R75.2 | length 3.2
  Top Layer w1: R74.1@49.632,50.101 49.632,48.544 49.682,48.493 R75.2@49.682,46.952
NetR79_2: R79.2 R80.1 U1.90 | length 48.1
  Top Layer w0.3: R80.1@34.188,62.598 38.067,62.598 38.079,62.586 R79.2@41.974,62.586 41.974,65.237 ; 41.801,70.032 41.801,65.41 41.974,65.237 ; v1(42.309,69.524) 41.974,69.189 41.974,65.237
  Routing 2 w0.3: v1(42.309,69.524) 46.677,69.524 47.084,69.118 47.084,55.351 v1(47.084,54.894)
  Routing 2 w0.5: 41.801,70.032 46.576,70.032 47.084,69.524 47.084,69.118 ; 46.627,54.894 47.084,55.351
  Bottom Layer w0.3: U1.90@45.653,56.266 45.653,55.097 45.856,54.894 v1(47.084,54.894)
NetR81_2: R81.2 U1.74 | length 118.1
  Routing 2 w0.3: 38.194,59.415 44.569,59.415 44.874,59.11 44.874,40.568 40.607,36.301 40.429,36.123 v1(38.6,36.123)
  Routing 2 w0.5: 37.889,59.92 44.598,59.92 45.407,59.11 45.407,40.568 41.14,36.301 40.607,36.301 v1@38.6,36.301 ; 38.295,59.517 44.468,59.517 44.569,59.415
  Bottom Layer w0.3: U1.74@37.053,54.166 38.27,54.268 38.194,55.046 38.194,59.415 ; v1(38.6,36.123) 38.6,32.542 39.007,32.136 40.378,32.136 43.228,29.286 R81.2@70.65,29.286
NetR82_2: R82.2 U1.73 | length 150.4
  Routing 2 w0.3: 34.697,53.666 36.619,51.744 36.619,37.597 38.6,35.615 40.962,35.615 45.484,40.137 52.799,40.137 53.903,40.137 55.948,38.091 64.698,29.342 67.15,26.89 70.523,23.517 v1(70.523,22.412)
  Routing 2 w0.5: 34.689,53.675 34.697,53.666 ; 34.816,55.707 37.965,52.557 37.965,45.775 41.445,42.296 53.51,42.296 55.948,39.857 55.948,38.091 55.948,36.987 ; 52.799,40.137 55.948,36.987 ; 70.523,21.671 67.15,25.044 67.15,25.786 ; v1(70.523,22.412) 67.15,25.786 ; 55.948,36.987 63.594,29.342 ; 55.948,36.987 55.948,34.98 56.456,34.472 58.184,34.472 63.314,29.342 63.594,29.342 ; 63.594,29.342 67.15,25.786 ; 63.594,29.342 64.698,29.342 66.693,29.342 67.15,28.884 67.15,26.89 67.15,25.786
  Bottom Layer w0.3: 34.697,53.666 U1.73@37.053,53.666 ; R82.2@70.523,19.761 v1(70.523,22.412)
NetR83_2: R83.2 U1.75 | length 82.3
  Routing 2 w0.5: 34.663,54.666 36.523,52.807 36.523,41.307 v1@40.48,37.35 ; v1(37.053,55.707) 39.616,55.707 40.48,54.843 v1@40.48,37.35 ; v1(40.48,37.165) v1@40.48,37.35 ; 40.834,36.996 v1@40.48,37.35
  Bottom Layer w0.3: U1.75@37.053,54.666 v1(37.053,55.707) ; v1(40.48,37.165) 52.443,37.165 54.247,35.361 54.247,31.323 55.009,30.561 61.943,30.561 62.502,31.12 62.502,32.923 68.39,38.811 R83.2@70.523,38.811
NetR91_1: R91.1 W21.1 | length 44.7
  Routing 1 w0.3: W21.1@-2.184,58.953 -0.808,60.33 6.977,60.33 8.739,58.568 30.298,58.568 v1(35.612,63.881)
  Bottom Layer w0.3: v1(35.612,63.881) R91.1@38.976,63.881
NetR92_1: R92.1 W22.1 | length 45.4
  Routing 1 w0.5: W22.1@-2.108,64.414 -0.894,63.2 1.389,63.2 2.173,63.983 24.601,63.983 25.265,64.648 25.265,65.232 34.308,65.638 34.714,68.432 v1(37.965,68.432)
  Bottom Layer w0.5: v1(37.965,68.432) 38.452,67.945 R92.1@38.976,67.945
NetR95_2: R95.2 W5.1 | length 11.5
  Bottom Layer w1: W5.1@0.305,23.012 5.368,23.012 5.406,22.974 R95.2@11.836,22.974
NetR96_2: R96.2 W7.1 | length 15.8
  Bottom Layer w0.5: W7.1@0.305,54.661 1.923,53.043 1.923,46.36 5.14,43.142 R96.2@7.468,43.142
NetR97_2: R97.2 W9.1 | length 10.1
  Bottom Layer w1: W9.1@-2.261,36.754 -0.69,35.184 2.608,35.184 4.166,36.741 R97.2@6.502,36.741
NetW1_1: W1.1 W6.2 W8.2 W10.2 | length 41.9
  Top Layer w1: W10.2@-2.235,45.695 W8.2@-2.235,40.996 -1.061,39.821 -1.061,31.729 -2.184,30.605 W6.2@-2.184,27.203
  Routing 2 w1: W1.1@-2.388,5.766 -3.513,6.891 -3.513,25.875 W6.2@-2.184,27.203
OR1: BJT3.2 ORG1.1 R59.2 | length 40.5
  Top Layer w0.3: v1(48.862,73.182) 48.862,63.602 48.862,62.517 49.987,61.392 v1(51.072,61.392)
  Top Layer w0.5: 48.862,63.602 v1(51.072,61.392)
  Routing 2 w0.3: v1(48.862,73.182) 62.629,73.182 v1(63.492,72.318)
  Bottom Layer w0.3: v1(51.072,61.392) ORG1.1@52.934,61.392 ; v1(63.492,72.318) 63.551,72.377 R59.2@66.421,72.377
  Bottom Layer w1: R59.2@66.421,72.377 68.318,72.377 68.602,72.661 BJT3.2@70.5,72.661
OR2: BJT4.2 ORG1.4 R60.2 | length 48
  Routing 2 w0.5: 50.941,69.88 67.632,69.88 68.039,69.474 68.039,63.49 ; v1(51.376,67.238) 55.567,67.238 57.193,65.613 64.821,65.613 v1(66.446,63.987)
  Bottom Layer w0.3: v1(51.376,67.238) 51.376,65.608 51.783,65.202 ORG1.4@52.934,65.202 ; R60.2@66.446,62.7 v1(66.446,63.987)
  Bottom Layer w0.5: R60.2@66.446,62.7 66.446,62.692 70.145,62.692 BJT4.2@70.145,62.704
OR3: BJT5.2 ORG1.9 R61.2 | length 41.3
  Bottom Layer w0.3: ORG1.9@57.963,67.742 56.761,67.742 56.66,67.843 56.66,69.448 57.066,69.855 72.103,69.855 72.789,69.169 72.789,56.926 71.798,55.935 70.78,55.935 70.145,55.3 BJT5.2@70.145,53.052
  Bottom Layer w0.5: R61.2@66.624,53.124 67.708,53.124 68.259,53.675 69.522,53.675 BJT5.2@70.145,53.052
OR5: BJT6.2 ORG2.1 R84.2 | length 19.6
  Bottom Layer w0.3: ORG2.1@60.655,27.838 70.193,27.838 71.315,28.961 71.315,30.389 70.297,31.407 69.664,31.407 ; R84.2@66.675,31.407 69.664,31.407 ; BJT6.2@70.297,33.164 70.297,32.04 69.664,31.407
OR6: BJT7.2 ORG2.4 R85.2 | length 10.8
  Bottom Layer w0.3: ORG2.4@60.655,24.028 64.577,24.028 65.86,22.746 R85.2@66.675,22.746
  Bottom Layer w0.7: R85.2@66.675,22.746 69.721,22.746 70.17,23.195 BJT7.2@70.17,23.766
R: U1.30 W15.1 W17.1 | length 55.1
  Top Layer w0.3: 43.79,76.378 43.713,76.302 43.713,70.383 43.155,69.825 43.155,65.634 44.526,64.262 44.526,55.702 48.539,51.689 48.608,50.347 48.539,45.009 48.184,41.377 v1(50.267,39.294)
  Bottom Layer w0.3: 43.79,76.378 W17.1@43.79,78.74 ; U1.30@48.653,41.066 48.743,39.294 v1(50.267,39.294)
  Bottom Layer w0.7: W17.1@43.79,78.74 45.161,80.112 45.161,81.854 45.687,82.38 48.659,82.38 W15.1@49.759,81.28
RX0: U1.2 W19.1 | length 33.9
  Top Layer w0.3: v1(54.191,54.573) 54.191,59.931 51.613,62.509 51.613,69.748 55.453,73.588 56.316,73.588 61.671,78.943 W19.1@63.322,78.943
  Bottom Layer w0.3: U1.2@52.253,54.166 53.785,54.166 v1(54.191,54.573)
SCK: U1.20 W17.2 | length 101.8
  Bottom Layer w0.3: W17.2@43.79,81.28 46.893,84.383 71.011,84.383 81.933,73.461 81.933,49.458 81.45,48.976 79.697,48.976 74.871,44.15 65.778,44.15 63.924,42.296 57.092,42.296 54.221,45.166 U1.20@52.253,45.166
TBATTERY_1: ADC2.6 CN3.2 | length 40.5
  Top Layer w0.3: v1(26.365,63.657) 28.884,63.657 v1(41.28,76.052)
  Bottom Layer w0.3: ADC2.6@26.365,62.319 v1(26.365,63.657) ; v1(41.28,76.052) 44.061,76.052 44.772,76.763 44.772,78.694 46.169,80.091 55.928,80.091 56.334,80.497 CN3.2@56.334,81.541
TBATTERY_2: ADC2.7 CN4.2 | length 20.8
  Bottom Layer w0.5: CN4.2@26.667,81.566 26.667,71.358 25.265,69.956 25.265,65.74 27.635,63.37 ADC2.7@27.635,62.319
TSA_X: ADC2.1 CN6.2 | length 16.3
  Top Layer w0.3: v1(19.25,75.62) CN6.2@19.25,78.302
  Routing 2 w1: v1(19.25,75.62) 19.25,65.428 v1(20.015,64.664)
  Bottom Layer w1: ADC2.1@20.015,62.319 v1(20.015,64.664)
TSA_Y+: ADC2.2 CN9.2 | length 97.6
  Top Layer w0.3: v1(19.133,61.193) 17.316,59.376 17.316,40.842 27.171,30.988 30.371,30.772 v1(30.371,5.237)
  Bottom Layer w0.3: v1(19.133,61.193) 21.184,61.193 ADC2.2@21.285,62.319 ; v1(30.371,5.237) 43.074,5.24 48.23,5.373 48.354,6.38 48.913,6.939 54.785,6.939 55.191,6.532 CN9.2@55.191,1.962
TSA_Y-: ADC2.3 CN10.2 | length 100.4
  Routing 2 w0.3: v1(22.081,64.606) 22.081,45.51 23.917,43.674 39.565,28.026 39.565,14.051 46.5,7.117 v1(46.5,4.17)
  Routing 2 w0.5: 23.917,43.674 23.917,62.77 ; 23.917,62.77 v1(22.081,64.606) 23.335,64.606 23.917,64.024 23.917,62.77
  Bottom Layer w0.3: v1(22.081,64.606) 22.555,64.132 ADC2.3@22.555,62.319 ; v1(46.5,4.17) 46.809,3.86 CN10.2@46.809,1.912
TSA_Z+: ADC2.4 CN13.2 | length 119.3
  Top Layer w0.3: v1(31.387,-3.45) v1(36.492,1.656)
  Top Layer w0.5: v1(31.387,-3.45) 31.387,16.515
  Routing 2 w0.3: v1(23.583,65.41) 22.116,65.41 21.43,64.724 21.43,43.997 36.492,28.935 36.492,17.073 v1(36.492,1.656)
  Routing 2 w0.5: 31.387,16.515 35.933,16.515 36.492,17.073
  Bottom Layer w0.3: v1(23.583,65.41) 23.825,65.168 ADC2.4@23.825,62.319 ; CN13.2@24.915,2.191 24.915,-2.998 25.367,-3.45 v1(31.387,-3.45)
TSA_Z-: ADC2.5 CN14.2 | length 74.4
  Routing 2 w0.3: v1(16.456,11.811) v1(16.456,60.792)
  Bottom Layer w0.3: CN14.2@16.456,2.191 v1(16.456,11.811) ; v1(16.456,60.792) 17.645,61.981 18.052,66.248 21.709,66.248 22.479,65.478 22.928,63.784 25.095,63.446 ADC2.5@25.095,62.319
TX0: U1.3 W20.2 | length 40.2
  Top Layer w0.3: v1(55.199,53.666) 55.199,60.458 52.799,62.859 52.799,69.524 62.889,70.058 65.206,72.375 65.206,77.754 W20.2@66.396,78.943
  Bottom Layer w0.3: U1.3@52.253,53.666 v1(55.199,53.666)
VDC_X: ADC1.6 R23.2 R24.1 | length 20.2
  Bottom Layer w1: R24.1@16.129,23.939 18.204,23.939 18.306,24.041 R23.2@20.396,24.041 24.486,24.041 25.926,25.481 25.926,32.161 24.432,33.655 ADC1.6@23.456,33.655
VDC_Y: ADC1.7 R37.2 R38.1 | length 9.1
  Bottom Layer w0.5: R38.1@16.205,32.118 R37.2@20.117,32.118
  Bottom Layer w1: R37.2@20.117,32.118 20.803,32.118 21.989,33.355 21.989,34.595 ADC1.7@23.456,34.925
VDC_Z: ADC1.8 R51.2 R52.1 | length 8.4
  Bottom Layer w0.3: R52.1@20.015,37.376 21.201,37.376 22.382,36.195 ADC1.8@23.456,36.195
  Bottom Layer w1: R51.2@15.824,37.376 16.934,37.376 17.24,37.682 18.982,37.682 19.288,37.376 R52.1@20.015,37.376
VREF_5: ADC1.15 ADC2.15 C35.2 U1.98 Vref2.1 | length 111.1
  Routing 1 w0.5: v1(29.523,28.575) 29.523,40.94 29.659,41.076
  Routing 2 w0.5: v1(25.323,60.589) 29.373,56.538 29.659,56.253 ; 29.659,41.076 29.659,56.253 ; v1(29.659,56.824) 29.659,56.253
  Bottom Layer w0.3: ADC2.15@21.285,57.619 21.658,58.601 23.647,60.589 v1(25.323,60.589) ; C35.2@21.529,42.596 21.529,41.768 22.116,41.182 25.465,41.182 25.976,29.185 ; Vref2.1@26.619,41.874 26.228,41.483 25.672,40.975 25.976,29.185 ; v1(29.523,28.575) ADC1.15@28.156,28.575 26.586,28.575 25.976,29.185 ; v1(29.659,56.824) 35.12,62.285 43.172,62.285 47.16,66.273 47.16,67.95 47.719,68.508 48.252,68.508 48.862,67.899 48.862,58.184 49.653,57.336 U1.98@49.653,56.266
VSA_X: D3.2 R14.1 R16.2 R17.2 | length 45.3
  Top Layer w0.3: D3.2@13.97,67.727 15.327,66.37 ; 15.327,66.37 15.695,66.002 R16.2@17.602,66.002 ; 15.327,66.37 R16.2@17.79,66.37 ; R16.2@17.602,66.002 18.966,66.002 19.334,66.37 ; R16.2@17.602,66.002 17.602,66.182 R16.2@17.79,66.37 ; R16.2@17.79,66.37 19.334,66.37 ; R16.2@17.79,66.37 21.355,69.935 21.355,68.391 ; 19.334,66.37 R17.2@20.714,66.37 21.249,66.37 21.355,66.476 21.355,68.391 ; 19.334,66.37 21.355,68.391
  Top Layer w0.5: D3.2@13.97,67.727 v1(16.584,70.341)
  Routing 1 w0.5: v1(16.584,70.341) v1(29.079,70.341)
  Bottom Layer w0.3: v1(29.079,70.341) 31.484,72.746 R14.1@33.084,72.746
VSA_Y: D7.2 D8.2 R28.1 R30.2 R31.2 | length 85.1
  Top Layer w0.3: v1(5.658,42.346) D8.2@3.988,40.676 5.789,38.875 R30.2@7.823,38.875 ; v1(13.697,42.346) D7.2@15.316,40.727
  Top Layer w0.5: D8.2@3.988,40.676 3.988,42.346 ; R30.2@7.823,38.875 R31.2@12.294,38.875
  Routing 1 w0.3: v1(5.658,42.346) v1(13.697,42.346)
  Routing 2 w0.3: v1(13.697,42.346) 14.8,41.243 14.8,5.059 15.207,4.653 16.426,4.653 18.61,6.837 18.61,17.912 v1(21.768,21.069)
  Bottom Layer w0.3: v1(21.768,21.069) R28.1@25.298,21.069
VSA_Z: D12.2 D13.2 R42.1 R44.2 R45.2 | length 67.4
  Routing 1 w0.3: v1(33.479,18.758) v1(39.609,12.628)
  Routing 1 w0.5: v1(25.03,13.64) 29.557,13.64 31.412,11.784 38.765,11.784 v1(39.609,12.628)
  Routing 2 w0.5: 22.616,18.758 28.085,13.289
  Bottom Layer w0.3: R42.1@18.644,18.758 v1(33.479,18.758) ; v1(39.609,12.628) D13.2@41.199,11.038
  Bottom Layer w0.5: D12.2@22.657,11.267 v1(25.03,13.64) ; R44.2@33.769,6.147 33.769,7.925 34.308,8.463 40.81,8.463 41.199,8.852 D13.2@41.199,11.038
  Bottom Layer w1: R45.2@30.721,6.147 R44.2@33.769,6.147
pads on no net: *Battery1.3 *Battery1.4 *Battery2.5 *Battery2.6 *Battery2.7 *CS1.1 *CS1.3 *CS1.8 *OverCP1.8 *OverCP2.8 *OverCP3.8 *OverCP4.8 *OverCP5.8 *OverCP6.8 *OverCP7.8 *OverCP8.8 H1.1 H1.2 H1.3 H1.4 H1.5 H1.6 H1.7 H1.9 H1.13 H1.14 H1.15 H1.16 H1.21 H1.23 H1.25 H1.27 H1.33 H1.34 H1.35 H1.36 H1.37 H1.38 H1.39 H1.40 H1.42 H1.44 H1.47 H1.48 H1.49 H1.50 H1.51 H1.52 ORG2.8 ORG2.9 ORG2.10 ORG2.11 ORG2.12 ORG2.13 U1.1 U1.4 U1.5 U1.6 U1.7 U1.8 U1.9 U1.12 U1.13 U1.14 U1.16 U1.19 U1.23 U1.24 U1.25 U1.26 U1.27 U1.28 U1.29 U1.38 U1.39 U1.40 U1.41 U1.42 U1.45 U1.46 U1.47 U1.48 U1.49 U1.50 U1.51 U1.52 U1.63 U1.64 U1.65 U1.66 U1.67 U1.68 U1.69 U1.70 U1.71 U1.72 U1.79 U1.82 U1.83 U1.84 U1.92 U1.93 U1.96 U1.97 Vref1.4 Vref2.4
copper on no net:
  other v2: 51.587,83.82

## Polygon pours and split planes (outlines as drawn)
GND on GND (split plane): 56.618,31.667 56.618,31.228 56.206,31.228 56.15,31.284 56.15,32.035 56.249,32.035
GND on GND (split plane): 175 vertices, not listed, extent -4.401,-4.541 90.031,84.741
EPS_5V_VCC on EPS_VCC (split plane): 175 vertices, not listed, extent -4.401,-4.541 90.031,84.741

## Other copper
GND (plane layer: these items are gaps in the copper):
  lines w0.3: 54.907,26.421 54.907,30.543 55.44,31.077 56.144,31.077 ; 57.15,31.077 59.301,33.228 ; 56.144,31.077 55.999,31.221 55.999,32.186 56.312,32.186 56.769,31.729 56.769,31.077 56.144,31.077

## Silkscreen, mask and mechanical layers (free items; w line width, h text height)
Mechanical 1:
  lines w0.254: 88.63,67.85 88.63,10.15 ccw(c89.728,10.15) 88.952,9.373 89.625,8.7 90.162,8.163 cw(c89.248,7.25) 90.54,7.25 90.54,-1.77 cw(c89.54,-1.77) 89.54,-2.77 61.02,-2.77 ccw(c61.02,-3.989) 60.158,-3.127 58.592,-4.693 cw(c57.73,-3.831) 57.73,-5.05 5.24,-5.05 cw(c5.24,-3.432) 4.096,-4.576 4.044,-4.524 ccw(c2.9,-5.668) 2.9,-4.05 -3.91,-4.05 cw(c-3.91,-3.05) -4.91,-3.05 -4.91,83.25 cw(c-3.91,83.25) -3.91,84.25 4.75,84.25 4.888,84.25 ccw(c4.888,85.957) 6.095,84.75 cw(c7.302,83.543) 7.302,85.25 7.44,85.25 74.82,85.25 cw(c74.82,82.57) 76.715,84.465 79.855,81.325 ccw(c81.75,83.22) 81.75,80.54 89.49,80.54 cw(c89.49,79.54) 90.49,79.54 90.49,71.67 cw(c88.124,71.67) 89.797,69.997 89.323,69.523

## Text inside footprints (layer, text, board x,y; h text height)
*Buck1: Top Overlay "*" at 32.499,20.371 h1.27 r90; Mechanical 13 "*" at 28.905,21.641 h1.27 r90
*Buck2: Top Overlay "*" at 31.763,47.879 h1.27 r90; Mechanical 13 "*" at 28.169,49.149 h1.27 r90
L1: Top Overlay "*" at 11.297,70.485 h1.27 r180; Mechanical 13 "*" at 9.773,70.485 h1.27 r180
L2: Top Overlay "*" at 2.241,32.944 h1.27; Mechanical 13 "*" at 3.765,32.944 h1.27
L3: Top Overlay "*" at 11.5,11.227 h1.27 r180; Mechanical 13 "*" at 9.976,11.227 h1.27 r180
L4: Top Overlay "*" at 77.978,39.63 h1.27 r90; Mechanical 13 "*" at 77.978,41.154 h1.27 r90
L5: Top Overlay "*" at 77.876,58.096 h1.27 r90; Mechanical 13 "*" at 77.876,59.62 h1.27 r90
ORG1: Mechanical 13 "*" at 53.835,60.909 h1.27 r180; Bottom Overlay "*" at 52.68,59.639 h1.27 r180
ORG2: Mechanical 13 "*" at 59.753,28.321 h1.27; Bottom Overlay "*" at 60.909,29.591 h1.27
Vref1: Mechanical 13 "*" at 46.698,8.595 h1.27; Bottom Overlay "*" at 47.523,9.561 h1.27
Vref2: Mechanical 13 "*" at 27.191,41.087 h1.27 r180; Bottom Overlay "*" at 26.365,40.122 h1.27 r180